# Altium PCB RHN-JD-PCB11-V1.00.PcbDoc
Units mm, origin at the board's own origin, x right, y up, seen from the top; angles counter-clockwise.
Board outline 27 x 49 mm, 2 copper layers (Top Layer, Bottom Layer); 39 components, 29 nets, 127 pads, 30 vias.
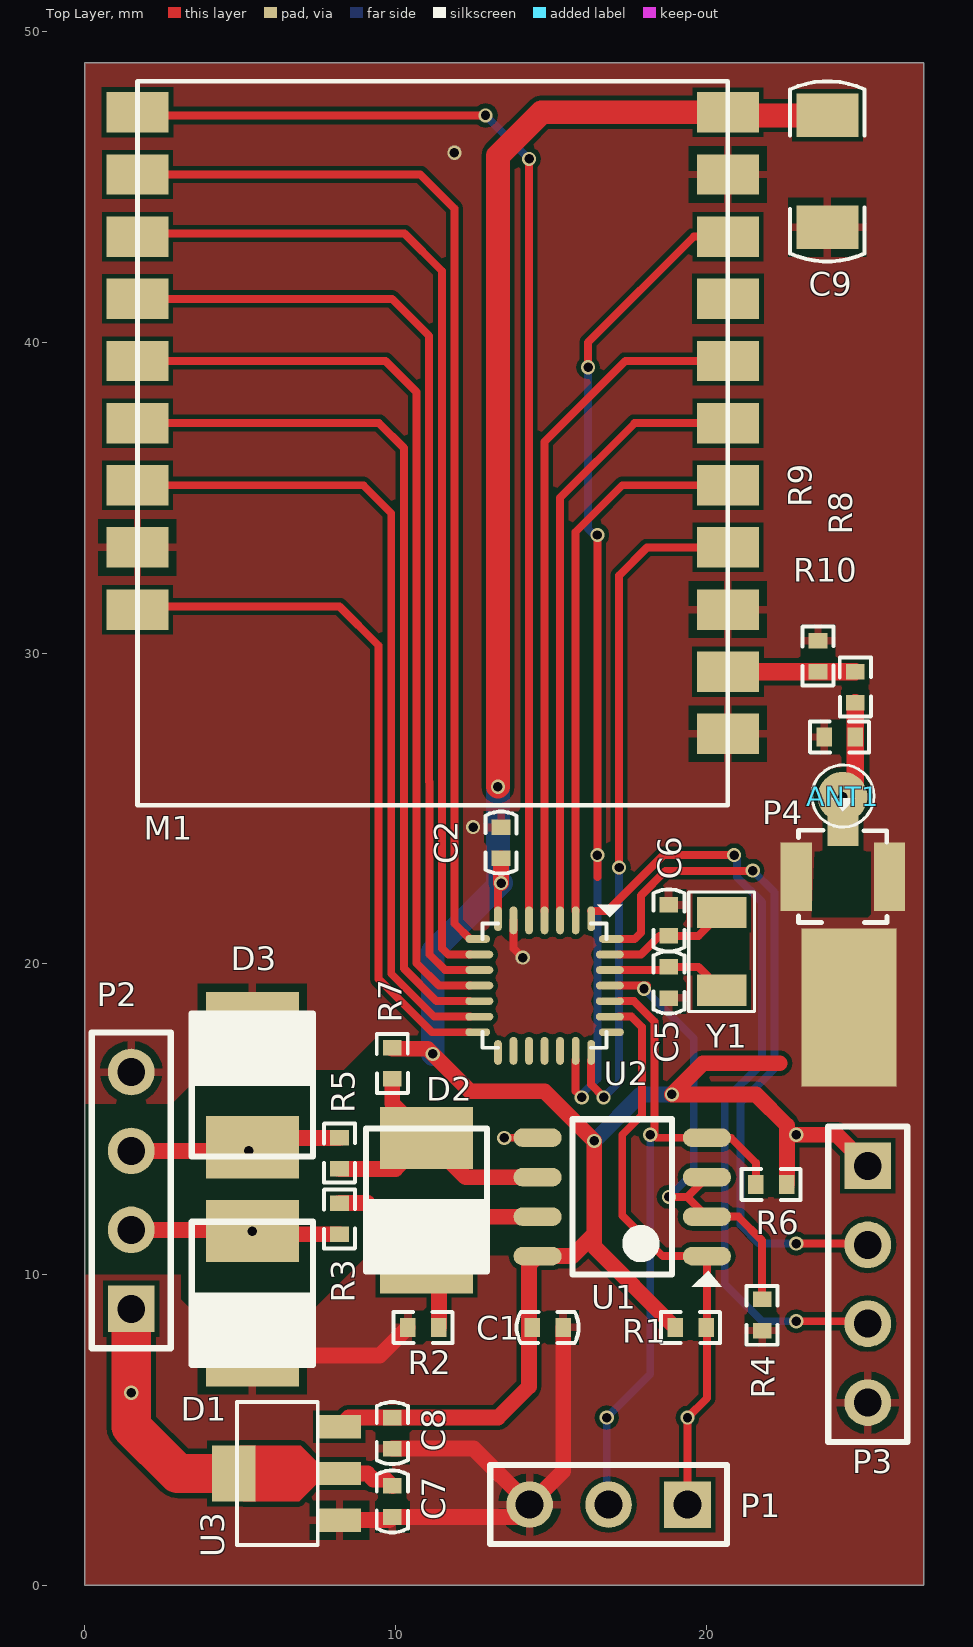
[diagram p0: Top Layer view]
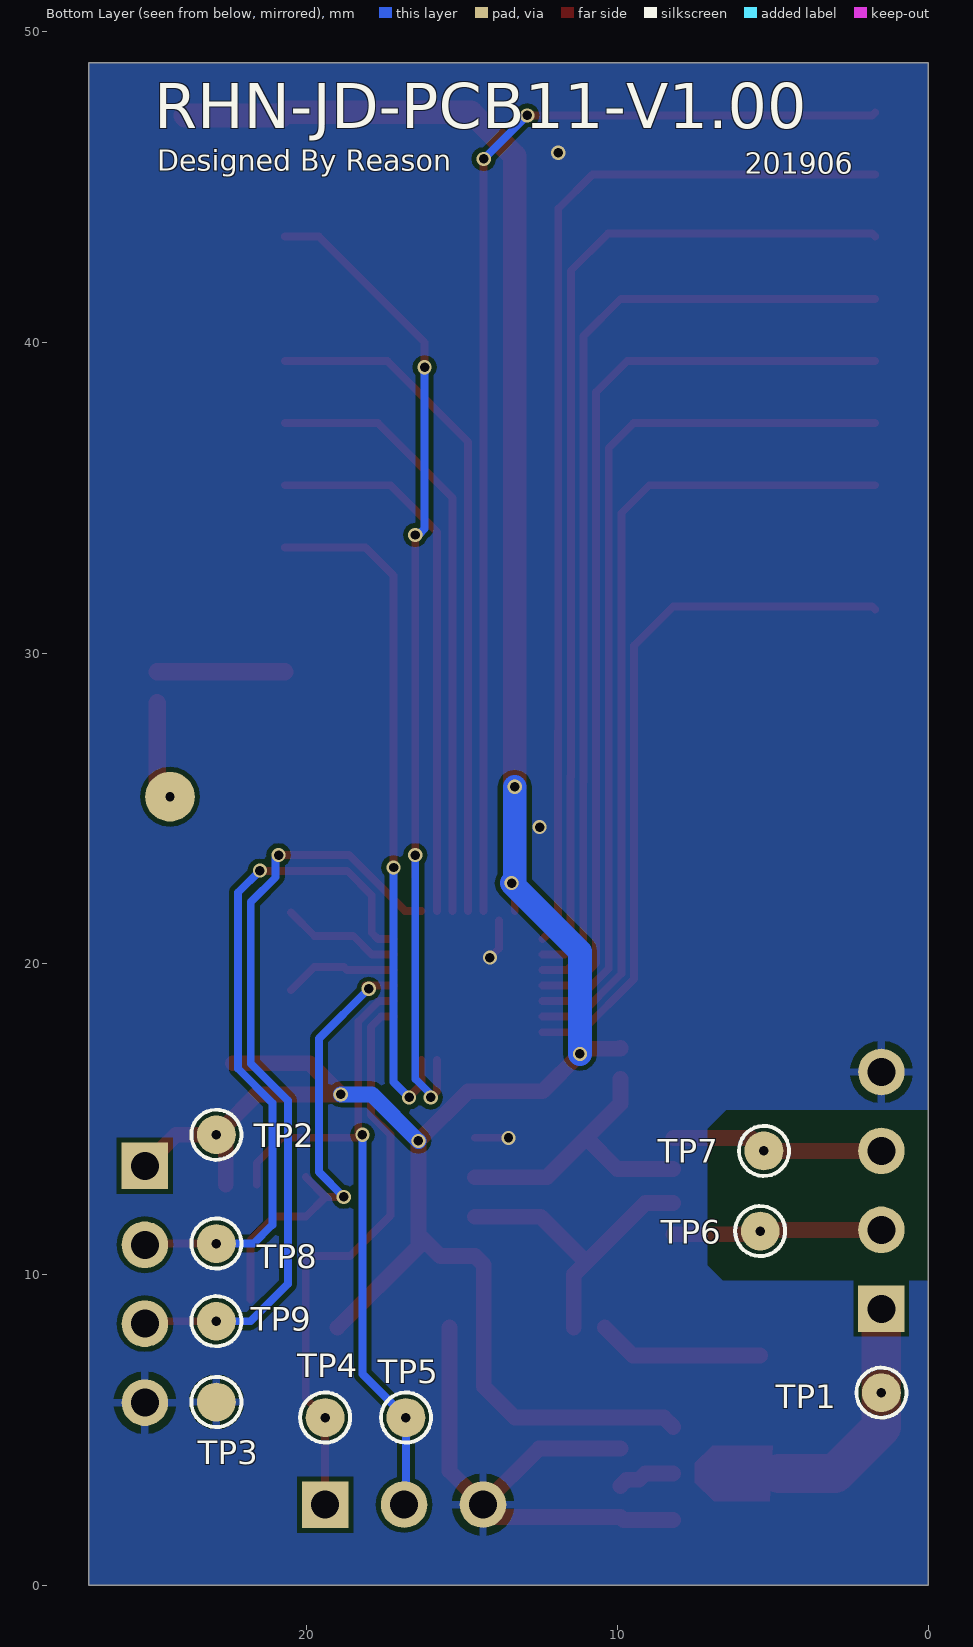
[diagram p1: Bottom Layer view, seen from below]
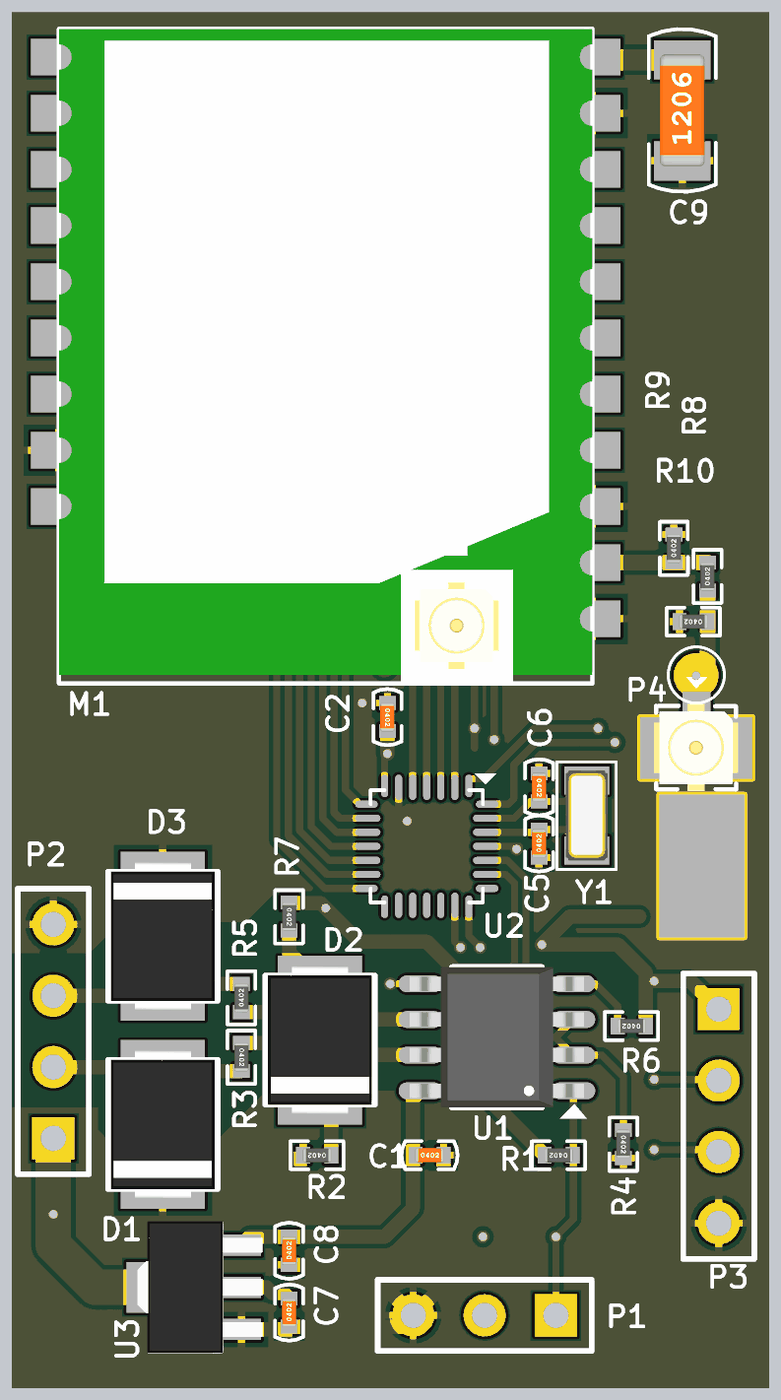
[diagram p2: 3D render of the assembled board from above, using the file's embedded part models]

## Layer stack, top to bottom
Top Solder: solder mask 0.0102, Solder Resist, Dk 3.5
Top Layer: signal copper 0.0356
Dielectric 1: dielectric 0.32, FR-4, Dk 4.8
Bottom Layer: signal copper 0.0356
Bottom Solder: solder mask 0.0102, Solder Resist, Dk 3.5

## Board outline
0,0 27,0 27,49 0,49

## Design rules (kind name [scope] priority, off if disabled: settings)
Clearance [All] p1: gap=0.152
ComponentClearance [All] p1 off: gap=0.254 collisioncheckmode=3 verticalgap=0.254 showdistances=FALSE
PolygonConnect p4-2 [HasPad('P4-2')] p1: connectstyle=Direct reliefconductorwidth=0.254 reliefentries=4 polygonreliefangle="90 Angle" airgapwidth=0.254
PolygonConnect free-2 [HasPad('Free-2')] p2: connectstyle=Direct reliefconductorwidth=0.254 reliefentries=4 polygonreliefangle="90 Angle" airgapwidth=0.254
PolygonConnect VIA [ISVIA] p3: connectstyle=Direct reliefconductorwidth=0.254 reliefentries=4 polygonreliefangle="90 Angle" airgapwidth=0.254
PolygonConnect [All] p4: connectstyle=Relief reliefconductorwidth=0.254 reliefentries=4 polygonreliefangle="90 Angle" airgapwidth=0.254
RoutingVias [All] p1: holewidth=0.305 width=0.457 viastyle="Through Hole" minholewidth=0.305 minwidth=0.457 maxholewidth=0.711 maxwidth=1.27
SolderMaskExpansion [All] p1: expansion=0.102
Width [All] p1: maxlimit=282.219 minlimit=0.152 preferedwidth=0.254
29 further rules are at their usual default settings.

## Components (designator, comment, footprint, x,y, rotation, side; value= is the part's Value field where it differs from the comment)
ANT1 "ANT" ANT_PAD 24.4,25.4 r90 top
C1 "100nf" c0402 14.9,8.3 r0 top
C2 "100nF" C0402 13.4,23.9 r270 top
C5 "nc" C0402 18.8,19.4 r90 top
C6 "nc" C0402 18.8,21.4 r270 top
C7 "1uF±10%/10V" C0402 9.9,2.7 r90 top
C8 "1uF±10%/10V" C0402 9.9,4.9 r90 top
C9 "47uf" C1206 23.9,45.5 r90 top
D1 "SMAJ6.5CA" SMB_2P_3R9X4R6 5.4,9.4 r270 top
D2 "SMAJ6.5CA" SMB_2P_3R9X4R6 11,12.4 r270 top
D3 "SMAJ6.5CA" SMB_2P_3R9X4R6 5.4,16.1 r90 top
M1 "LORA" LORA_PIN_1 11.2,36.9 r180 top
P1 "Header 3" HDR1X3 19.4,2.6 r180 top
P2 "SWD" HDR1X4 1.5,8.9 r90 top
P3 "SWD" HDR1X4 25.2,13.5 r270 top
P4 "ANT" IPEX_3R0X3R0 24.4,22.8 r180 top
R1 "10K±5%" R0402 19.5,8.3 r180 top
R2 "4.7K±5%" R0402 10.9,8.3 r180 top
R3 "22R±5%" R0402 8.2,11.8 r270 top
R4 "10K±5%" R0402 21.8,8.7 r270 top
R5 "22R±5%" R0402 8.2,13.9 r90 top
R6 "10K±5%" R0402 22.1,12.9 r180 top
R7 "4.7K±5%" R0402 9.9,16.8 r270 top
R8 "0R" R0402 24.8,28.9 r90 top
R9 "NC" R0402 23.6,29.9 r90 top
R10 "NC" R0402 24.3,27.3 r180 top
TP1 "Value" TP_D1R25 1.5,6.2 r90 bottom
TP2 "Value" TP_D1R25 22.9,14.5 r0 bottom
TP3 "Value" TP_D1R25 22.9,5.9 r0 bottom
TP4 "Value" TP_D1R25 19.4,5.4 r0 bottom
TP5 "Value" TP_D1R25 16.8,5.4 r0 bottom
TP6 "Value" TP_D1R25 5.4,11.4 r0 bottom
TP7 "Value" TP_D1R25 5.28,13.98 r180 bottom
TP8 "Value" TP_D1R25 22.9,11 r180 bottom
TP9 "Value" TP_D1R25 22.9,8.5 r180 bottom
U1 "SP3485EN" SOP_8P_1R27_3R9X4R9 17.3,12.5 r180 top
U2 "STM8L151G4U6" QFN_28P_0R5_4R0X4R0 14.8,19.3 r270 top
U3 "ht7333" SOT89_3P_1R5_2R5X4R5 6.2,3.6 r90 top
Y1 "nc" SMD_Crystal_2P_1R5X3R2 20.5,20.4 r270 top

## Footprints (in the part's own frame and the unit in brackets; to place one, negate y for a bottom-side part, rotate by r counter-clockwise, add the part's x,y. Pads: shape width x height; smd on the part's side, far side on the other; paste and mask are expansions set on the pad)
ANT_PAD [mm]
  round 1.6 hole 0.3: 1(-0.022,0.007)
  silkscreen extent -1,-1 1,1
c0402 [mm] "C0402"
  rect 0.5x0.6 smd: 1(-0.5,0) 2(0.5,0)
  Top Layer pour cut-out: -0.15,0.413 -0.15,-0.416 0.16,-0.417 0.16,0.415
  silkscreen extent -1,-0.5 1,0.5, body extent -0.86,-0.43 0.88,0.41, height 0.51
C0402 [mm] "C0402"
  rect 0.5x0.6 smd: 1(-0.5,0) 2(0.5,0)
  Top Layer pour cut-out: -0.15,0.413 -0.15,-0.416 0.16,-0.417 0.16,0.415
  silkscreen extent -1,-0.5 1,0.5, body extent -0.86,-0.43 0.88,0.41, height 0.51
C1206 [mm] "C1206"
  rect 1.4x2 smd: 1(-1.8,0) 2(1.8,0)
  silkscreen extent -2.9,-1.2 2.9,1.2, body extent -2.6,-1.1 2.6,1.1, height 1.53
HDR1X3 [mm] "Connector; Header; 3 Position"
  rect 1.5x1.5 hole 0.9: 1(0,0)
  round 1.5 hole 0.9: 2(2.54,0) 3(5.08,0)
  silkscreen extent -1.27,-1.27 6.35,1.27
HDR1X4 [mm] "Connector; Header; 4 Position"
  rect 1.5x1.5 hole 0.9: 1(0,0)
  round 1.5 hole 0.9: 2(2.54,0) 3(5.08,0) 4(7.62,0)
  silkscreen extent -1.27,-1.27 8.89,1.27
IPEX_3R0X3R0 [mm]
  rect 1x1 smd: 1(0,-1.5)
  rect 1x2.2 smd: 2(-1.5,0) 2(1.5,0)
  silkscreen extent -1.42,-2.53 1.43,1.47, body extent -2,-2 2,2, height 1.3
LORA_PIN_1 [mm]
  rect 2x1.3 smd: 1(9.5,-10.5) 2(9.5,-8.5) 3(9.5,-6.5) 4(9.5,-4.5) 5(9.5,-2.5) 6(9.5,-0.5) 7(9.5,1.5) 8(9.5,3.5) 9(9.5,5.5) 10(-9.5,9.5) 11(-9.5,7.5) 12(-9.5,5.5) 13(-9.5,3.5) 14(-9.5,1.5) 15(-9.5,-0.5) 16(-9.5,-2.5) 17(-9.5,-4.5) 18(-9.5,-6.5) 19(-9.5,-8.5) 20(-9.5,-10.5)
  silkscreen extent -9.5,-11.5 9.5,11.8, body extent -9.5,-11.5 9.5,11.75, height 1.7
QFN_28P_0R5_4R0X4R0 [mm]
  oval 0.8x0.25 smd: 1(-2.15,1.5) 7(-2.15,-1.5) 15(2.15,-1.5) 21(2.15,1.5)
  oval 0.9x0.25 smd: 2(-2.1,1) 3(-2.1,0.5) 4(-2.1,0) 5(-2.1,-0.5) 6(-2.1,-1) 16(2.1,-1) 17(2.1,-0.5) 18(2.1,0) 19(2.1,0.5) 20(2.1,1)
  oval 0.25x0.8 smd: 8(-1.5,-2.15) 14(1.5,-2.15) 22(1.5,2.15) 28(-1.5,2.15)
  oval 0.25x0.9 smd: 9(-1,-2.1) 10(-0.5,-2.1) 11(0,-2.1) 12(0.5,-2.1) 13(1,-2.1) 23(1,2.1) 24(0.5,2.1) 25(0,2.1) 26(-0.5,2.1) 27(-1,2.1)
  silkscreen extent -2.6,-2 2,2.5, body extent -2,-2 2,2, height 0.01
R0402 [mm]
  rect 0.5x0.6 smd: 1(-0.5,0) 2(0.5,0)
  Top Layer pour cut-out: -0.15,0.413 -0.15,-0.416 0.16,-0.417 0.16,0.415
  silkscreen extent -0.94,-0.5 0.96,0.5, body extent -0.86,-0.43 0.88,0.41, height 0.51
SMB_2P_3R9X4R6 [mm]
  rect 2x3 smd: 1(-2,0) 2(2,0)
  silkscreen extent -2.3,-1.95 2.3,1.95, body extent -3.16,-1.93 3.15,1.97, height 2.2
SMD_Crystal_2P_1R5X3R2 [mm]
  rect 1x1.6 smd: 1(-1.25,0) 2(1.25,0)
  silkscreen extent -1.91,-1.06 1.93,1.05, body extent -1.91,-1.06 1.93,1.05, height 0.8
SOP_8P_1R27_3R9X4R9 [mm] "SOP, 8-Leads, Body 4.89x3.90mm, Pitch 1.27mm, IPC Medium Density"
  oval 1.55x0.6 smd: 1(-2.725,1.905) 2(-2.725,0.635) 3(-2.725,-0.635) 4(-2.725,-1.905) 5(2.725,-1.905) 6(2.725,-0.635) 7(2.725,0.635) 8(2.725,1.905)
  silkscreen extent -3.2,-2.5 1.6,2.89, body extent -3.7,-2.75 3.7,2.75, height 1.75
SOT89_3P_1R5_2R5X4R5 [mm]
  rect 0.75x1.4 smd: 1(-1.5,-2) 2(0,-2) 3(1.5,-2)
  rect 1.8x1.4 smd: 2(0,1.4)
  Top Layer region: -0.9,1.1 -0.9,-0.7 -0.3,-1.3 0.35,-1.3 0.9,-0.75 0.9,1.2
  silkscreen extent -2.3,-1.3 2.3,1.3, body extent -2.35,-2.83 2.35,2.1, height 1.7
TP_D1R25 [mm]
  round 1.25 smd paste-1.25: 1(0,0)
  silkscreen extent -0.81,-0.8 0.81,0.81, body extent -0.8,-0.8 0.8,0.8, height 0.01

## Part data
ANT1: library part Socket, "Socket"
C1 C2 C5 C6 C9: library part 无极性电容, "无极性电容"
C7 C8: library part 1.2.04.05.0024, "MLCC_1uF±10%_10V_X5R_0402"
D1 D2 D3: library part 1.2.08.99.0052, "半导体放电管-P821P0080SCLRP-200A(10/160us)-It2.2A/4Vt-6Vdrm-50pF-SMB"
M1: library part LORA_PIN_1
P1: "Header, 3-Pin"
P2 P3: library part "Header 4", "Header, 4-Pin"
P4: library part BNC, "BNC Elbow Connector"
R1 R4 R6 R8 R9 R10: library part 1.2.03.01.0012, "电阻-10K±5%-1/16W-0402"
R2 R7: library part 1.2.03.01.0366, "电阻-4.7K±5%-1/16W-0402"
R3 R5: library part 1.2.03.01.0573, "电阻-4.7R±5%-1/16W-0402"
TP1 TP2 TP3 TP4 TP5 TP6 TP7 TP8 TP9: library part Test_Point, "测试点"
U1: library part 1.2.18.09.0173, "RS485收发器-SP3485EN-支持485收发-SOP8"
U3: library part 1.2.18.07.0002, "HT7333_LDO稳压_100mA/3.3V_Vmax=30V_SOT89"
Y1: library part 两脚晶体谐振器, "两脚晶体谐振器"

## Free pads (board coordinates)
  rect 3.048x5.08 smd: 2(24.6,18.6)

## Via types
v1: diameter 0.457, hole 0.305, Top Layer to Bottom Layer, tented both sides, 30 vias

## Nets (pads, with @x,y where several pads share a name; then routed paths per layer and width w, separated by ;. In a path a pad name is that pad's centre, name@x,y a point inside that pad or via, vN(x,y) a via of type N, cw(c..) or ccw(c..) an arc to the next point about the centre after c; other vN are vias at no path point)
GND: C1.2 C2.1 C5.1 C6.1 C7.1 C8.1 C9.1 D1.2 D3.2 M1.8 M1.10 M1.12 M1.19 P1.3 P2.4 P3.4 P4.2 pad.2 R2.2 R4.2 R9.2 R10.2 TP3.1 U1.5 U2.6 U3.1 | length 25.4
  Top Layer w0.254: v1(13.5,14.4) 13.505,14.405 U1.5 ; U2.6 13.8,20.5 v1(14.1,20.2)
  Top Layer w0.508: D1.2 9.5,7.4 R2.2 ; U3.1 9.8,2.1 C7.1 13.92,2.2 P1.3 ; C8.1 12.52,4.4 P1.3 ; C1.2 15.4,3.68 P1.3
  other v1: 12.5,24.4 11.9,46.1
LORA_RST: M1.18 U2.20 | length 32.6
  Top Layer w0.254: U2.20@15.8,16.9 15.8,15.9 v1(16,15.7) ; v1(16.2,39.2) 16.2,40 19.6,43.4 M1.18 ; 16.5,22.8 v1(16.5,23.5) v1(16.5,33.8)
  Bottom Layer w0.254: v1(16,15.7) 16,15.8 16.5,16.3 v1(16.5,23.5) ; v1(16.2,39.2) 16.2,34 16.4,33.8 v1(16.5,33.8)
M2_CS: M1.7 U2.13 | length 26.5
  Top Layer w0.254: M1.7 8.968,35.4 9.868,34.5 9.868,19.683 11.251,18.3 U2.13@12.4,18.3
M2_DIO0: M1.14 U2.2 | length 17.7
  Top Layer w0.254: U2.2@15.8,21.7 15.8,33.9 17.3,35.4 M1.14
M2_DIO1: M1.15 U2.3 | length 19.7
  Top Layer w0.254: U2.3@15.3,21.7 15.3,35 17.7,37.4 M1.15
M2_DIO2: M1.16 U2.4 | length 22.1
  Top Layer w0.254: U2.4@14.8,21.7 14.8,36.8 17.4,39.4 M1.16
M2_DIO3: M1.1 U2.5 | length 37.4
  Top Layer w0.254: M1.1 1.8,47.3 v1(12.9,47.3) ; U2.5@14.3,21.7 v1(14.3,45.9)
  Bottom Layer w0.254: v1(12.9,47.3) v1(14.3,45.9)
M2_DIO4: M1.2 U2.8 | length 34.4
  Top Layer w0.254: M1.2 10.8,45.4 11.9,44.3 11.9,27.5 11.906,27.494 11.906,21.294 U2.8@12.4,20.8
M2_DIO5: M1.3 U2.9 | length 33.1
  Top Layer w0.254: M1.3 1.8,43.5 10.294,43.5 11.494,42.3 11.494,26.032 11.5,26.025 11.5,20.5 11.7,20.3 U2.9@12.4,20.3
M2_RXEN: M1.9 U2.14 | length 22.7
  Top Layer w0.254: M1.9 1.8,31.5 8.2,31.5 9.462,30.238 9.462,19.514 11.176,17.8 U2.14@12.4,17.8
M2_TXEN: M1.13 U2.21 | length 22.3
  Top Layer w0.254: U2.21@16.3,16.9 16.3,16.118 16.7,15.718 v1(16.7,15.7) ; v1@17.2,23 v1(17.2,23.1) 17.2,32.5 18.1,33.4 M1.13
  Bottom Layer w0.254: v1(16.7,15.7) 17.2,16.2 v1(17.2,23.1)
NetD2_1: D2.1 R5.1 R7.2 U1.6 | length 9.7
  Top Layer w0.508: R5.1 10,13.4 D2.1 ; R7.2 9.9,15.5 D2.1 ; U1.6 12.265,13.135 D2.1
NetD2_2: D2.2 R2.1 R3.1 U1.7 | length 10
  Top Layer w0.508: R3.1 9.1,12.3 D2.2 ; R2.1 11.4,10 D2.2 ; U1.7 12.465,11.865 D2.2
NetM1_11: M1.11 R8.2 R9.1 | length 4.1
  Top Layer w0.559: M1.11 R8.2
NetP4_1: ANT1.1 P4.1 R8.1 R10.1 | length 3.2
  Top Layer w0.559: ANT1.1 24.8,25.785 R8.1
NRST: P3.3 TP9.1 U2.1 | length 25.1
  Top Layer w0.254: U2.1@16.3,21.7 16.825,21.7 18.625,23.5 v1(20.9,23.5) ; v1(22.9,8.5) 25.12,8.5 P3.3
  Bottom Layer w0.254: v1(20.9,23.5) 20.992,23.408 20.992,22.79 21.794,21.988 21.794,16.794 20.6,15.6 20.6,9.7 21.8,8.5 v1(22.9,8.5)
OSC32_IN: C5.2 U2.26 Y1.2 | length 3.7
  Top Layer w0.254: U2.26@17.2,19.8 18.7,19.8 C5.2 19.75,19.9 Y1.2
OSC32_OUT: C6.2 U2.27 Y1.1 | length 3.9
  Top Layer w0.254: U2.27@17.2,20.3 17.9,20.3 18.5,20.9 C6.2 19.75,20.9 Y1.1
PC2/USART1_RX: P1.1 R1.1 TP4.1 U1.1 U2.23 | length 18.7
  Top Layer w0.254: U2.23@17.2,18.3 17.6,18.3 17.929,17.971 17.929,15.129 17.3,14.5 17.3,11.9 18.605,10.595 U1.1 20.025,6.025 v1(19.4,5.4) P1.1
PC3/USART1_TX: P1.2 R6.2 TP5.1 U1.4 U2.24 | length 21.9
  Top Layer w0.254: U2.24@17.2,18.8 17.675,18.8 18.336,18.139 18.336,14.536 18.3,14.5 18.395,14.405 U1.4 20.795,14.405 21.6,13.6 R6.2
  Bottom Layer w0.254: P1.2 16.8,2.66 v1(16.8,5.4) 18.2,6.8 v1(18.2,14.5)
PC4/RS485_TREN: R4.1 U1.2 U1.3 U2.25 | length 15.1
  Top Layer w0.254: U2.25@17.2,19.3 18.1,19.3 v1(18,19.2) ; v1(18.8,12.5) 19.39,12.5 ; U1.3 19.39,12.5 ; R4.1 21.8,11.1 21.035,11.865 U1.2 19.39,12.5
  Bottom Layer w0.254: v1(18,19.2) 19.6,17.6 19.6,13.3 v1(18.8,12.5)
RS485_A: D3.1 P2.3 R5.2 TP7.1 | length 6.9
  Top Layer w0.508: P2.3 v1(5.28,13.98) D3.1 5.7,14.4 R5.2
RS485_B: D1.1 P2.2 R3.2 TP6.1 | length 6.8
  Top Layer w0.508: P2.2 5.36,11.44 v1(5.4,11.4) 5.5,11.3 R3.2
SPI1_MISO: M1.5 U2.11 | length 29.8
  Top Layer w0.254: M1.5 9.681,39.4 10.681,38.4 10.681,20.019 11.4,19.3 U2.11@12.4,19.3
SPI1_MOSI: M1.6 U2.12 | length 28.2
  Top Layer w0.254: M1.6 9.474,37.4 10.274,36.6 10.274,19.851 11.325,18.8 U2.12@12.4,18.8
SPI1_SCK: M1.4 U2.10 | length 31.3
  Top Layer w0.254: M1.4 9.887,41.4 11.087,40.2 11.087,25.863 11.094,25.857 11.094,20.306 11.6,19.8 U2.10@12.4,19.8
SWIM: P3.2 TP8.1 U2.28 | length 22.4
  Top Layer w0.254: U2.28@17.2,20.8 17.7,20.8 17.9,21 17.9,22.2 18.692,22.992 21.492,22.992 v1(21.5,23) ; v1(22.9,11) 25.16,11 P3.2
  Bottom Layer w0.254: v1(21.5,23) 22.2,22.3 22.2,16.625 21.1,15.525 21.1,11.6 21.7,11 v1(22.9,11)
VCC+3V3: C1.1 C2.2 C8.2 C9.2 M1.20 P3.1 R1.2 R6.1 R7.1 TP2.1 U1.8 U2.7 U3.3 | length 86.5
  Top Layer w0.254: U2.7@13.3,21.7 13.3,22.5 v1(13.4,22.6)
  Top Layer w0.508: U3.3 8.5,5.4 C8.2 13.3,5.4 14.3,6.4 14.3,10.32 U1.8 15.695,10.595 16.4,11.3 ; R7.1 9.9,17.267 11.033,17.267 v1(11.2,17.1) 12.4,15.9 14.8,15.9 v1(16.4,14.3) 16.4,11.3 ; v1(13.4,22.6) C2.2 ; R1.2 16.4,10.9 16.4,11.3 ; 22.37,16.8 19.9,16.8 v1(18.9,15.8) 21.6,15.8 22.6,14.8 R6.1 ; v1(22.9,14.5) 24.2,14.5 P3.1
  Top Layer w0.762: v1(13.3,25.7) 13.3,46 14.7,47.4 M1.20 20.8,47.3 C9.2
  Bottom Layer w0.508: v1(16.4,14.3) 17.9,15.8 v1(18.9,15.8)
  Bottom Layer w0.762: v1(11.2,17.1) 11.2,20.4 v1(13.4,22.6) 13.3,22.7 v1(13.3,25.7)
VCC+5V0: C7.2 P2.1 TP1.1 U3.2 | length 9.6
  Top Layer w0.508: U3.2@8.2,3.6 9.1,3.6 9.3,3.4 9.7,3.4 C7.2
  Top Layer w1.27: P2.1 1.5,5.1 3,3.6 U3.2@4.8,3.6
  other v1: 1.5,6.2
pads on no net: M1.17 U2.15 U2.16 U2.17 U2.18 U2.19 U2.22

## Polygon pours and split planes (outlines as drawn)
GND on Top Layer "Top Layer-No Net" (solid, remove dead copper, pour order 2): 0,0 27,0 27,49 0,49
GND on Bottom Layer "Top Layer-No Net" (solid, remove dead copper, pour order 1): 0,0 27,0 27,49 0,49

## Other copper
Top Layer:
  pour cut-out: 21.4,21 21.4,19.7 20.8,19.7
  pour cut-out: 23.4,21.5 25.2,21.5 25.3,21.6 25.3,23.6 23.5,23.6
  pour cut-out: 0,15.524 0.024,15.5 2.8,15.5 3.9,16.6 8.345,16.6 9.448,17.702 11.798,17.702 16,13.5 16,11.095 15.5,10.595 15.495,10.6 9.1,10.6 6.9,8.4 3.9,8.4 3.1,9.2 3.1,10 0,10
Bottom Layer:
  pour cut-out: 0,15.312 0.012,15.3 6.5,15.3 7.1,14.7 7.1,10.3 6.602,9.802 0,9.802

## Silkscreen, mask and mechanical layers (free items; w line width, h text height)
Bottom Overlay:
  text "RHN-JD-PCB11-V1.00" at 24.9,46.4 h2.5
  text "Designed By Reason" at 24.8,45.3 h1.14
  text "201906" at 5.9,45.2 h1.14
Mechanical 1:
  the board outline again, w0.1

## Dimensions
24.97,26.24 to 25.77,27.34 on Mechanical 2
25.3,26.1 to 25,23.8 on Mechanical 2
26.8,23.8 to 26.2,21.1 on Mechanical 2
26.8,21.1 to 26.2,16.1 on Mechanical 2
23.1,15.8 to 26.1,15.254 on Mechanical 2